# Altium PCB 100863.pcbdoc (part 2 of 2)
Units mm, origin at the board's own origin, x right, y up, seen from the top; angles counter-clockwise.
Board outline 84 x 22 mm, 2 copper layers (Top Layer, Bottom Layer), stack 1.471 mm thick; 42 components, 21 nets, 119 pads, 46 vias.
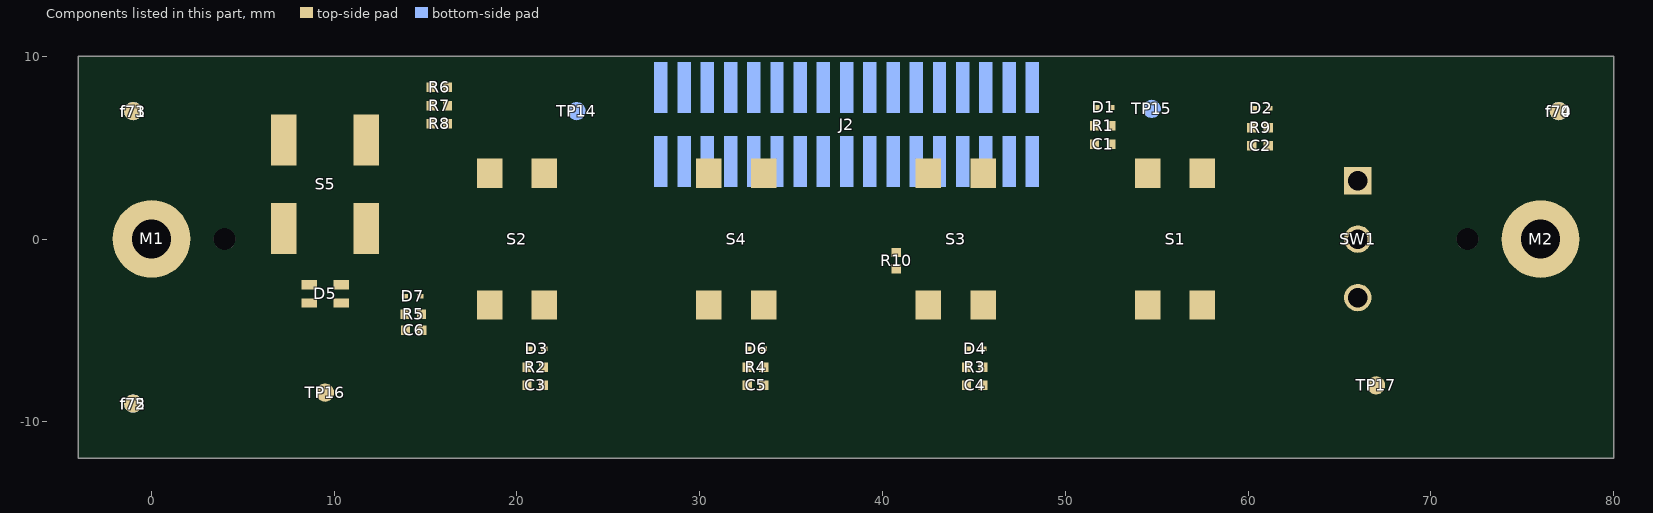
[diagram p2: the components of this part, seen from the top]

## Silkscreen, mask and mechanical layers (free items; w line width, h text height) (continued)
DXF_JULY21_TOP:
  circle w0.013: c73.5,116.775 r1.075
  circle w0.013: c69.5,116.775 r0.6
  circle w0.013: c1.5,116.775 r0.6
  circle w0.013: c-2.5,116.775 r1.075
  circle w0.013: c185.382,117.195 r0.6
  circle w0.013: c189.382,117.195 r1.075
  circle w0.013: c113.382,117.195 r1.075
  circle w0.013: c117.382,117.195 r0.6
  circle w0.013: c236.244,119.355 r1.75
  circle w0.013: c302.744,116.355 r1.075
  circle w0.013: c230.744,116.355 r0.6
  circle w0.013: c298.744,116.355 r0.6
  circle w0.013: c226.744,116.355 r1.075
  circle w0.013: c282.744,116.355 r1.25
  circle w0.013: c258.744,116.355 r1.25
  circle w0.013: c246.744,116.355 r1.25
  circle w0.013: c270.744,116.355 r1.25
  circle w0.013: c0.371,50.771 r1.075
  circle w0.013: c4.371,50.771 r0.6
  circle w0.013: c72.371,50.771 r0.6
  circle w0.013: c76.371,50.771 r1.075
  circle w0.013: c112.386,50.12 r1.075
  circle w0.013: c112.386,50.12 r2.5
  circle w0.013: c188.386,50.12 r1.075
  circle w0.013: c188.386,50.12 r2.5
  circle w0.013: c116.386,50.12 r0.6
  circle w0.013: c184.386,50.12 r0.6
  circle w0.013: c227.092,49.784 r1.075
  circle w0.013: c231.092,49.784 r0.6
  circle w0.013: c299.092,49.784 r0.6
  circle w0.013: c303.092,49.784 r1.075
  circle w0.013: c44,0 r1.25
  circle w0.013: c20,0 r1.25
  circle w0.013: c32,0 r1.25
  circle w0.013: c56,0 r1.25
  circle w0.013: c0,0 r1.075
  circle w0.013: c72,0 r0.6
  circle w0.013: c4,0 r0.6
  circle w0.013: c76,0 r1.075
  circle w0.013: c9.5,3 r1.75
  lines w0.013: 119.382,105.195 119.382,127.195 ; 119.382,105.195 109.382,105.195 109.382,127.195 119.382,127.195 ; 119.382,105.195 183.382,105.195 ; 119.382,127.195 183.382,127.195 ; 183.382,105.195 193.382,105.195 193.382,127.195 183.382,127.195 ; 183.382,105.195 183.382,127.195 ; -6.5,104.775 77.5,104.775 77.5,126.775 -6.5,126.775 -6.5,104.775 ; -4,-12 80,-12 80,10 -4,10 -4,-12 ; -3.629,38.771 80.371,38.771 80.371,60.771 -3.629,60.771 -3.629,38.771 ; 6.5,0 12.5,0 12.5,6 6.5,6 6.5,0 ; 8.6,-3.9 10.4,-3.9 10.4,-2.1 8.6,-2.1 8.6,-3.9 ; 17.75,-2.25 17.75,2.25 22.25,2.25 22.25,-2.25 17.75,-2.25 ; 29.75,-2.25 34.25,-2.25 34.25,2.25 29.75,2.25 29.75,-2.25 ; 41.75,-2.25 41.75,2.25 46.25,2.25 46.25,-2.25 41.75,-2.25 ; 53.75,-2.25 58.25,-2.25 58.25,2.25 53.75,2.25 53.75,-2.25 ; 63.079,-5.626 63.079,5.626 68.921,5.626 68.921,-5.626 63.079,-5.626 ; 64.273,0 67.727,0 67.727,3.429 64.273,3.429 64.273,0 ; 108.386,38.12 192.386,38.12 192.386,60.12 108.386,60.12 108.386,38.12 ; 222.744,104.355 222.744,126.355 306.744,126.355 306.744,104.355 222.744,104.355 ; 223.092,37.784 307.092,37.784 307.092,59.784 223.092,59.784 223.092,37.784 ; 233.244,116.355 233.244,122.355 239.244,122.355 239.244,116.355 233.244,116.355 ; 235.344,112.455 235.344,114.255 237.144,114.255 237.144,112.455 235.344,112.455 ; 244.494,114.105 248.994,114.105 248.994,118.605 244.494,118.605 244.494,114.105 ; 254.297,55.604 275.887,55.604 275.887,59.034 254.297,59.034 254.297,55.604 ; 255.177,56.484 275.007,56.484 275.007,58.154 255.177,58.154 255.177,56.484 ; 256.494,114.105 256.494,118.605 260.994,118.605 260.994,114.105 256.494,114.105 ; 268.494,114.105 272.994,114.105 272.994,118.605 268.494,118.605 268.494,114.105 ; 280.494,114.105 280.494,118.605 284.994,118.605 284.994,114.105 280.494,114.105 ; 289.823,110.729 295.665,110.729 295.665,121.981 289.823,121.981 289.823,110.729 ; 291.017,116.355 291.017,119.784 294.471,119.784 294.471,116.355 291.017,116.355
  text "KEEP WITHIN/KEEP OUT" at 128.09,147.012 h3.17
  text "BOARD OUTLINE" at 14.923,145.752 h3.17
  text "COMPONENT PLACEMENT" at 243.916,145.131 h3.17
  text "PRIMARY" at -32.89,114.665 h3.17
  text "SECONDARY" at -36.821,51.369 h3.17
Drill Drawing:
  circle w0.254: c119.937,-8.007 r0.508
  circle w0.254: c119.937,-8.007 r0.847
  lines w0.254: 119.09,-16.05 119.513,-16.05 119.513,-16.473 120.36,-16.473 120.36,-16.05 120.783,-16.05 120.783,-15.203 120.36,-15.203 120.36,-14.78 119.513,-14.78 119.513,-15.203 119.09,-15.203 119.09,-16.05 ; 119.09,-12.24 119.513,-12.24 119.937,-12.663 120.36,-12.24 120.783,-12.24 120.36,-11.817 120.783,-11.393 120.36,-11.393 119.937,-10.97 119.513,-11.393 119.09,-11.393 119.513,-11.817 119.09,-12.24 ; 119.09,-4.197 119.937,-5.043 120.783,-4.197 119.937,-3.35 119.09,-4.197 ; 119.09,-1.233 120.783,-1.233 120.783,0.46 119.09,0.46 119.09,-1.233 ; 119.429,-12.071 119.683,-12.071 119.937,-12.325 120.191,-12.071 120.445,-12.071 120.191,-11.817 120.445,-11.563 120.191,-11.563 119.937,-11.309 119.683,-11.563 119.429,-11.563 119.683,-11.817 119.429,-12.071
  lines w0.381: 117.571,-17.616 337.018,-17.616 ; 117.571,1.434 337.018,1.434 ; 131.564,-21.426 131.564,5.244 ; 145.276,-21.426 145.276,5.244 ; 172.954,-21.426 172.954,5.244 ; 185.803,-21.426 185.803,5.244 ; 204.442,-21.426 204.442,5.244 ; 242.531,-21.426 242.531,5.244 ; 257.513,-21.426 257.513,5.244 ; 276.456,-21.426 276.456,5.244 ; 308.197,-21.426 308.197,5.244 ; 117.571,-21.426 337.018,-21.426 337.018,5.244 117.571,5.244 117.571,-21.426
  text "Symbol" at 119.857,2.577 h1.83
  text "Count" at 132.707,2.577 h1.83
  text "Hole Size" at 146.419,2.577 h1.83
  text "Plated" at 174.097,2.577 h1.83
  text "Hole Type" at 186.946,2.577 h1.83
  text "Drill Layer Pair" at 205.585,2.577 h1.83
  text "Via/Pad" at 243.674,2.577 h1.83
  text "Pad Shape" at 258.656,2.577 h1.83
  text "Template" at 277.599,2.577 h1.83
  text "Hole Tolerance" at 309.34,2.577 h1.83
  text "2" at 132.707,-1.233 h1.52
  text "0.250mm (9.84mil)" at 146.419,-1.233 h1.52
  text "PTH" at 174.097,-1.233 h1.52
  text "Round" at 186.946,-1.233 h1.52
  text "Top Layer - Bottom Layer" at 205.585,-1.233 h1.52
  text "Via" at 243.674,-1.233 h1.52
  text "Rounded" at 258.656,-1.233 h1.52
  text "v50h25m0mx0" at 277.599,-1.233 h1.52
  text "44" at 132.707,-5.043 h1.52
  text "0.250mm (9.84mil)" at 146.419,-5.043 h1.52
  text "PTH" at 174.097,-5.043 h1.52
  text "Round" at 186.946,-5.043 h1.52
  text "Top Layer - Bottom Layer" at 205.585,-5.043 h1.52
  text "Via" at 243.674,-5.043 h1.52
  text "Rounded" at 258.656,-5.043 h1.52
  text "v50h25m0mx0(Tol0-25)" at 277.599,-5.043 h1.52
  text "+0.000mm/-0.250mm" at 309.34,-5.043 h1.52
  text "3" at 132.707,-8.853 h1.52
  text "1.070mm (42.13mil)" at 146.419,-8.853 h1.52
  text "PTH" at 174.097,-8.853 h1.52
  text "Round" at 186.946,-8.853 h1.52
  text "Top Layer - Bottom Layer" at 205.585,-8.853 h1.52
  text "Pad" at 243.674,-8.853 h1.52
  text "(Mixed)" at 258.656,-8.853 h1.52
  text "(Mixed)" at 277.599,-8.853 h1.52
  text "+/-0.076mm" at 309.34,-8.853 h1.52
  text "2" at 132.707,-12.663 h1.52
  text "1.200mm (47.24mil)" at 146.419,-12.663 h1.52
  text "NPTH" at 174.097,-12.663 h1.52
  text "Round" at 186.946,-12.663 h1.52
  text "Top Layer - Bottom Layer" at 205.585,-12.663 h1.52
  text "Pad" at 243.674,-12.663 h1.52
  text "Rounded" at 258.656,-12.663 h1.52
  text "c120hn120(Tol8-8)" at 277.599,-12.663 h1.52
  text "+/-0.076mm" at 309.34,-12.663 h1.52
  text "2" at 132.707,-16.473 h1.52
  text "2.150mm (84.65mil)" at 146.419,-16.473 h1.52
  text "PTH" at 174.097,-16.473 h1.52
  text "Round" at 186.946,-16.473 h1.52
  text "Top Layer - Bottom Layer" at 205.585,-16.473 h1.52
  text "Pad" at 243.674,-16.473 h1.52
  text "Rounded" at 258.656,-16.473 h1.52
  text "c425h215(Tol8-8)" at 277.599,-16.473 h1.52
  text "+/-0.076mm" at 309.34,-16.473 h1.52
  text "53 Total" at 132.707,-20.283 h1.52
  text ".Layer_Name" at 17.581,-25.042 h3.81

## Text inside footprints (layer, text, board x,y; h text height)
D1: Mechanical 32 "A" at 51.34,7.52 h0.64 r180; Mechanical 32 "C" at 53.345,7.512 h0.64 r180
D2: Mechanical 32 "A" at 59.97,7.47 h0.64 r180; Mechanical 32 "C" at 61.975,7.462 h0.64 r180
D3: Mechanical 32 "A" at 20.32,-5.68 h0.64 r180; Mechanical 32 "C" at 22.325,-5.688 h0.64 r180
D4: Mechanical 32 "A" at 44.32,-5.68 h0.64 r180; Mechanical 32 "C" at 46.325,-5.688 h0.64 r180
D6: Mechanical 32 "A" at 32.32,-5.68 h0.64 r180; Mechanical 32 "C" at 34.325,-5.688 h0.64 r180
D7: Mechanical 32 "A" at 15.048,-3.44 h0.64; Mechanical 32 "C" at 13.043,-3.431 h0.64
J2: Bottom Overlay "1" at 27.101,8.675 h0.76
M1: Mechanical 18 "1" at -1.771,0.011 h0.64
M2: Mechanical 18 "1" at 74.222,0 h0.64
SW1: Top Overlay "1" at 68,6.5 h1 r270; Top Overlay "3" at 68,-6 h1 r270